# EAGLE board VisualightMicroDIY_033_gnd (EAGLE 6.2)
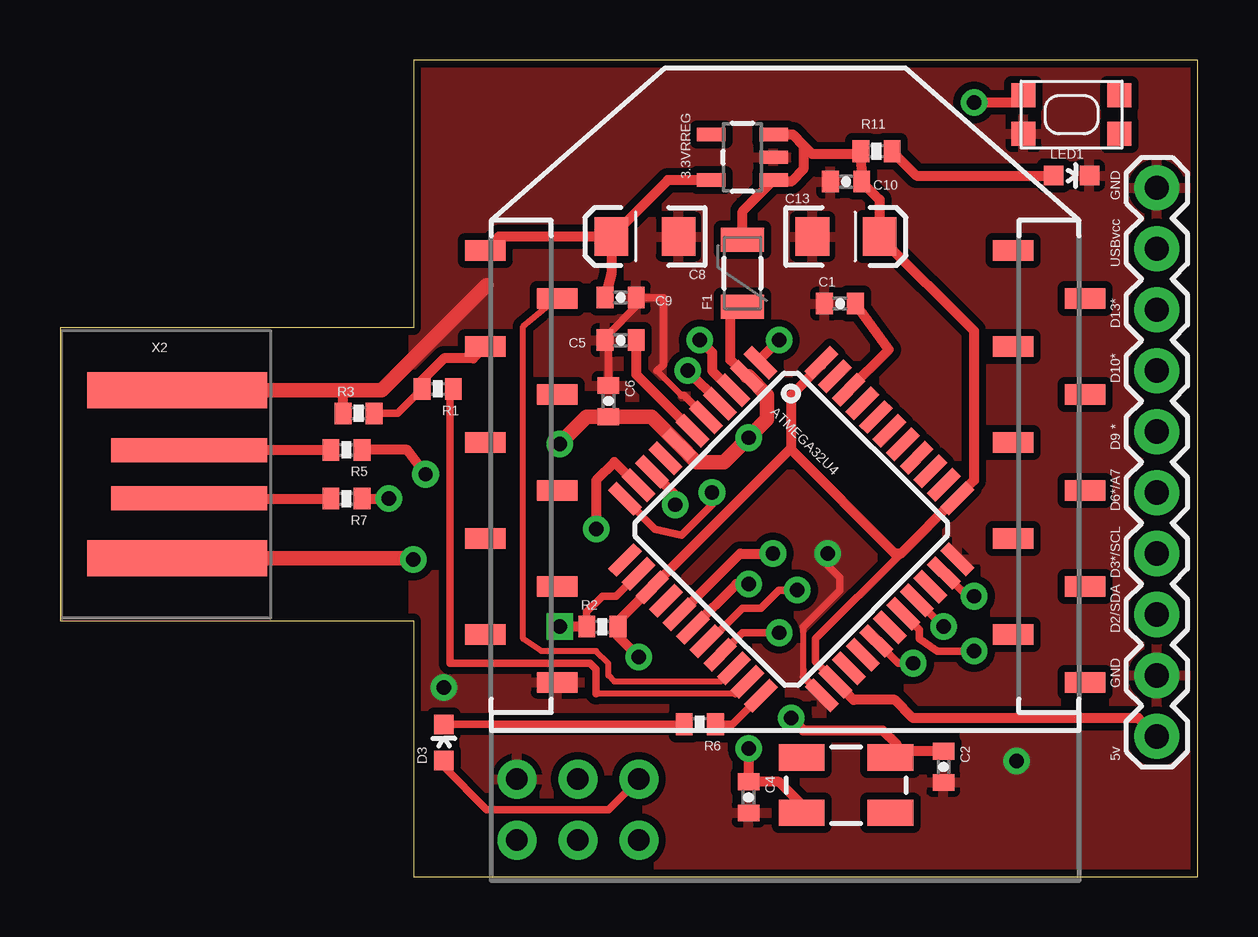
[diagram p0: board, top side]
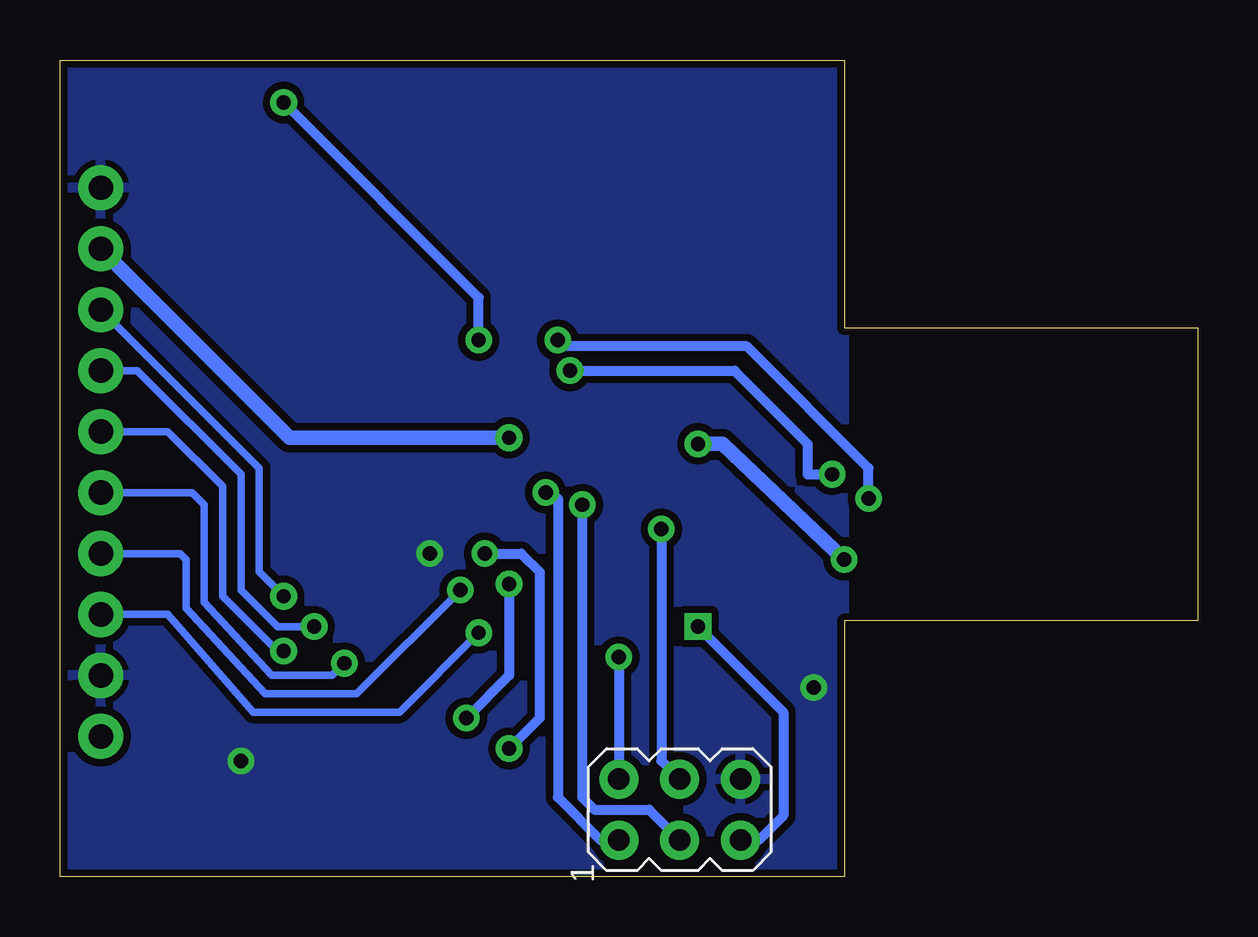
[diagram p1: board, bottom side, seen from below]

Size 47.42 x 34.03 mm. Coordinates in mm from the lower left corner, seen from the top.
Outline: 14.73,0 47.42,0 47.42,34.03 14.73,34.03 14.73,22.86 0,22.86 0,10.67 14.73,10.67 14.73,0
Copper layers (1*16): Top 0.035mm / dielectric 1.5mm / Bottom 0.035mm
Design rules: minimum track width 8mil, minimum drill 20mil, track to track 8mil, track to pad 8mil, pad to pad 8mil, via to via 8mil, smd to smd 8mil, copper to edge 10mil, drill to drill 8mil, minimum pad ring 12mil, minimum via ring 10mil, stop-mask expansion 4mil, vias tented up to drill 25mil, thermal gap 10mil
Net classes: 0 default: width 0.003 mm, drill 0.254 mm, clearance 0.152 mm

## Footprints (pad centres in the part's own frame; a part is rotated, then mirrored left to right if it is on the bottom)
SOT23-5 = smd 0.55 x 1.2: 1 -0.95,-1.3; 2 0,-1.3; 3 0.95,-1.3; 4 0.95,1.3; 5 -0.95,1.3
SPARKFUN-DIGITALIC_TQFP44 = smd 1.5 x 0.5: 1 -5.8,4; 2 -5.8,3.2; 3 -5.8,2.4; 4 -5.8,1.6; 5 -5.8,0.8; 6 -5.8,0; 7 -5.8,-0.8; 8 -5.8,-1.6; 9 -5.8,-2.4; 10 -5.8,-3.2; 11 -5.8,-4; 23 5.8,-4; 24 5.8,-3.2; 25 5.8,-2.4; 26 5.8,-1.6; 27 5.8,-0.8; 28 5.8,0; 29 5.8,0.8; 30 5.8,1.6; 31 5.8,2.4; 32 5.8,3.2; 33 5.8,4 | smd 0.5 x 1.5: 12 -4,-5.8; 13 -3.2,-5.8; 14 -2.4,-5.8; 15 -1.6,-5.8; 16 -0.8,-5.8; 17 0,-5.8; 18 0.8,-5.8; 19 1.6,-5.8; 20 2.4,-5.8; 21 3.2,-5.8; 22 4,-5.8; 34 4,5.8; 35 3.2,5.8; 36 2.4,5.8; 37 1.6,5.8; 38 0.8,5.8; 39 0,5.8; 40 -0.8,5.8; 41 -1.6,5.8; 42 -2.4,5.8; 43 -3.2,5.8; 44 -4,5.8
0402-CAP = smd 0.7 x 0.9: 1 -0.65,0; 2 0.65,0
EIA3216 = smd 1.4 x 1.6: A 1.4,0; C -1.4,0
LED-0603 = smd 0.8 x 0.8: A 0,-0.75; C 0,0.75
PTC-1206 = smd 1 x 1.8: 1 -1.4,0; 2 1.4,0
AVRISP = drill 0.9 pad 1.626: 1 -1.27,2.54; 2 1.27,2.54; 3 -1.27,0; 4 1.27,0; 5 -1.27,-2.54; 6 1.27,-2.54
1X10 = drill 1.016 pad 1.88: 1 0,0; 2 2.54,0; 3 5.08,0; 4 7.62,0; 5 10.16,0; 6 12.7,0; 7 15.24,0; 8 17.78,0; 9 20.32,0; 10 22.86,0
0402-RES = smd 0.7 x 0.9: 1 -0.65,0; 2 0.65,0
KMR2 = smd 1 x 1: 1 2,0.8; 2 2,-0.8; 3 -2,0.8; 4 -2,-0.8
XBEE-SMD = smd 1.7 x 0.85: 1 -12.5,20; 2 -9.5,18; 3 -12.5,16; 4 -9.5,14; 5 -12.5,12; 6 -9.5,10; 7 -12.5,8; 8 -9.5,6; 9 -12.5,4; 10 -9.5,2; 11 12.5,2; 12 9.5,4; 13 12.5,6; 14 9.5,8; 15 12.5,10; 16 9.5,12; 17 12.5,14; 18 9.5,16; 19 12.5,18; 20 9.5,20
USB-A-PCB = smd 7.5 x 1.5: 5V -0.2,-3.5; GND -0.2,3.5 | smd 6.5 x 1: USB_M 0.3,-1; USB_P 0.3,1
CRYSTAL-SMD-5X3 = smd 1.9 x 1.1: 1 -1.85,-1.15; 2 1.85,-1.15; 3 1.85,1.15; 4 -1.85,1.15

## Placement (x,y rotation side)
3.3VRREG  MIC5219 3.3V  [SOT23-5]  28.45,29.97 90 top
ATMEGA32U4  ATMEGA32U4  [SPARKFUN-DIGITALIC_TQFP44]  30.48,14.48 315.1 top
C1  0.1uF  [0402-CAP]  32.51,23.88 0 top
C2  22pF  [0402-CAP]  36.83,4.57 270 top
C4  22pF  [0402-CAP]  28.7,3.3 270 top
C5  1uF  [0402-CAP]  23.37,22.35 0 top
C6  1uF  [0402-CAP]  22.86,19.81 270 top
C8  10uF  [EIA3216]  24.38,26.67 180 top
C9  0.1uF  [0402-CAP]  23.37,24.13 180 top
C10  1uF  [0402-CAP]  32.77,28.96 180 top
C13  10uF  [EIA3216]  32.77,26.67 0 top
D3  Green  [LED-0603]  16,5.59 0 top
F1  500mA  [PTC-1206]  28.45,25.15 90 top
ISP1  AVRISP-6  [AVRISP]  21.59,2.79 90 bottom
JP1  M10"  [1X10]  45.72,5.84 90 top
LED1  Red  [LED-0603]  42.16,29.21 270 top
R1  2.2K  [0402-RES]  15.75,20.32 180 top
R2  10K  [0402-RES]  22.61,10.41 0 top
R3  3.3K  [0402-RES]  12.45,19.3 0 top
R5  22  [0402-RES]  11.94,17.78 180 top
R6  330  [0402-RES]  26.67,6.35 180 top
R7  22  [0402-RES]  11.94,15.75 180 top
R11  1K  [0402-RES]  34.04,30.23 180 top
SW1  SPST_TACT-KMR2  [KMR2]  42.16,31.75 0 top
U$1  XBEE-1B3  [XBEE-SMD]  30.23,6.1 0 top
X2  USBPCB  [USB-A-PCB]  5.08,16.76 0 top
Y1  16MHz  [CRYSTAL-SMD-5X3]  32.77,3.81 0 top

## Library data of the parts
3.3VRREG = SparkFun-PowerIC; PROD_ID: VREG-09872
ATMEGA32U4 = SparkFun-DigitalIC
C1 C2 C4-C6 C8-C10 C13 D3 F1 LED1 R1-R3 R5-R7 R11 Y1 = SparkFun
ISP1 SW1 = adafruit
JP1 X2 = SparkFun-Connectors
U$1 = SparkFun-RF; PROD_ID: CONN-09042

## Nets
+3V3_OUT: 3.3VRREG.5 C8.A C9.2 U$1.1
A0: ATMEGA32U4.36
A1: ATMEGA32U4.37
A2: ATMEGA32U4.38
A3: ATMEGA32U4.39
A4: ATMEGA32U4.40
A5: ATMEGA32U4.41
AREF: ATMEGA32U4.42 C1.2
D2: ATMEGA32U4.19 JP1.3
D3: ATMEGA32U4.18 JP1.4
D4: ATMEGA32U4.25
D5: ATMEGA32U4.31
D6: ATMEGA32U4.27 JP1.5
D7: ATMEGA32U4.1 SW1.3
D8: ATMEGA32U4.28
D9: ATMEGA32U4.29 JP1.6
D10: ATMEGA32U4.30 JP1.7
D11: ATMEGA32U4.12
D12: ATMEGA32U4.26
D13: ATMEGA32U4.32 JP1.8
D17: ATMEGA32U4.8
D+: ATMEGA32U4.4 R5.1
D-: ATMEGA32U4.3 R7.1
GND [vcc]: 3.3VRREG.2 ATMEGA32U4.5 ATMEGA32U4.15 ATMEGA32U4.23 ATMEGA32U4.33 ATMEGA32U4.35 ATMEGA32U4.43 C1.1 C2.2 C4.2 C5.1 C6.1 C8.C C9.1 C10.2 C13.C ISP1.6 JP1.2 JP1.10 LED1.C R3.1 SW1.4 U$1.10 X2.GND
MISO: ATMEGA32U4.11 ISP1.1
MOSI: ATMEGA32U4.10 ISP1.4
N$1: ATMEGA32U4.16 C4.1 Y1.1
N$2: ATMEGA32U4.17 C2.1 Y1.3
N$4: ATMEGA32U4.6 C5.2
N$6: R7.2 X2.USB_M
N$7: D3.C R6.2
N$8: R5.2 X2.USB_P
N$38: LED1.A R11.1
RESET: ATMEGA32U4.13 ISP1.5 R2.1
SCK: ATMEGA32U4.9 ISP1.3
TX: ATMEGA32U4.21 R1.1
TXLED: ATMEGA32U4.22 R6.1
UVCC: ATMEGA32U4.2 ATMEGA32U4.7 C6.2 F1.1 JP1.9 X2.5V
VCC: 3.3VRREG.1 3.3VRREG.3 ATMEGA32U4.14 ATMEGA32U4.24 ATMEGA32U4.34 ATMEGA32U4.44 C10.1 C13.A D3.A F1.2 ISP1.2 JP1.1 R2.2 R11.2
WIFIDIN: R1.2 R3.2 U$1.3
WIFIDOUT: ATMEGA32U4.20 U$1.2

## Tracks (layer width: path | path; a pad name or v marks a point on that pad's centre or on a via)
+3V3_OUT
  Top 0.406: C8.A 22.98,25.13 C9.2 | C8.A 18.3,26.67 U$1.1 | 3.3VRREG.5 25.34,29.02 C8.A
AREF
  Top 0.406: ATMEGA32U4.42 34.55,21.96 C1.2
D2  (via drill 0.6)
  Top 0.305: v29.97,10.16 28.44,10.16 ATMEGA32U4.19
  Bottom 0.305: JP1.3 42.93,10.92 39.37,6.86 33.27,6.86 v29.97,10.16
D3  (via drill 0.6)
  Top 0.305: v30.73,11.94 29.97,11.94 29.21,11.18 28.45,11.18 26.92,9.65 26.92,9.78 ATMEGA32U4.18
  Bottom 0.305: JP1.4 42.42,13.46 42.16,13.21 42.16,11.18 38.86,7.62 35.05,7.62 v30.73,11.94
D6  (via drill 0.6)
  Top 0.305: v35.56,8.89 34.95,8.89 ATMEGA32U4.27
  Bottom 0.305: JP1.5 41.91,16 41.4,15.49 41.4,11.43 38.61,8.38 36.07,8.38 v35.56,8.89
D7  (via drill 0.6)
  Top 0.406: ATMEGA32U4.1 29.2,21.58 v29.97,22.35 | v38.1,32.26 39.87,32.26 SW1.3
  Bottom 0.406: v29.97,22.35 29.97,24.13 v38.1,32.26
D9  (via drill 0.6)
  Top 0.305: v38.1,9.4 36.58,9.4 35.81,9.91 35.81,10.29 ATMEGA32U4.29
  Bottom 0.305: JP1.6 42.93,18.54 40.64,16.26 40.64,11.68 38.35,9.4 v38.1,9.4
D10  (via drill 0.6)
  Top 0.305: v36.83,10.41 36.82,10.41 ATMEGA32U4.30
  Bottom 0.305: JP1.7 44.2,21.08 39.88,16.76 39.88,11.94 38.35,10.41 v36.83,10.41
D13  (via drill 0.6)
  Top 0.305: v38.1,11.68 37.81,11.68 ATMEGA32U4.32
  Bottom 0.305: JP1.8 39.12,17.02 39.12,12.7 v38.1,11.68
D+  (via drill 0.6)
  Top 0.406: ATMEGA32U4.4 27.5,19.74 v26.16,21.08 | v15.24,16.76 14.48,17.78 R5.1
  Bottom 0.406: v26.16,21.08 19.3,21.08 16.26,18.03 16.26,16.76 v15.24,16.76
D-  (via drill 0.6)
  Top 0.406: R7.1 v13.72,15.75 | v26.67,22.35 27.18,21.84 27.18,21.08 27.99,20.27 ATMEGA32U4.3
  Bottom 0.406: v13.72,15.75 13.72,17.02 18.8,22.1 26.42,22.1 v26.67,22.35
GND  (via drill 0.6)
  Top 0.254: 30.99,8.33 30.99,10.41 | 25.91,20.07 24.89,21.08
  Top 0.305: ATMEGA32U4.23 30.99,8.33 | 30.99,10.41 32.51,11.94 32.51,12.45 32,12.95 v32,13.46 | ATMEGA32U4.5 26.01,20.07 25.91,20.07 | 24.89,21.08 25.15,21.34 25.15,24.13 C9.1 24.02,23.76 22.86,22.61 C6.1
  Top 0.406: R3.1 11.8,20.12 11.94,20.26
  Top 0.61: X2.GND 11.94,20.26 13.41,20.26 17.78,24.64
  other vias: 16,7.87 39.88,4.83
  pour Top (isolate 0.305): 14.73,34.04 47.5,34.04 47.5,25.15 47.5,0 14.73,0
  pour Bottom (isolate 0.305): 14.73,34.04 47.5,34.04 47.5,0 14.73,0
MISO  (via drill 0.6)
  Top 0.305: ATMEGA32U4.11 24.81,14.48 25.91,14.22 27.18,15.49 v27.18,16
  Bottom 0.406: v27.18,16 26.67,15.75 26.67,3.3 24.89,1.52 ISP1.1
MOSI  (via drill 0.6)
  Top 0.406: ATMEGA32U4.10 24.08,16.3 23.11,17.27 22.35,16.51 v22.35,14.48
  Bottom 0.406: v22.35,14.48 22.35,4.83 ISP1.4
N$1  (via drill 0.6)
  Top 0.406: Y1.1 30.92,3.01 29.97,3.95 C4.1 v28.7,5.33 | ATMEGA32U4.16 28.35,13.46 v29.72,13.46
  Bottom 0.406: v29.72,13.46 28.19,13.46 27.43,12.7 27.43,6.6 v28.7,5.33
N$2  (via drill 0.6)
  Top 0.406: C2.1 34.88,5.22 | 34.88,5.22 Y1.3 | ATMEGA32U4.17 28.19,12.19 v28.7,12.19 | v30.48,6.6 30.99,6.1 34.29,6.1 34.88,5.51 34.88,5.22
  Bottom 0.406: v28.7,12.19 28.7,8.38 v30.48,6.6
N$4
  Top 0.406: C5.2 24.02,20.93 ATMEGA32U4.6
N$6
  Top 0.305: X2.USB_M 5.4,15.75
  Top 0.406: 5.4,15.75 R7.2
N$7
  Top 0.305: R6.2 16.01,6.35 D3.C
N$8
  Top 0.305: X2.USB_P 5.4,17.78
  Top 0.406: 5.4,17.78 R5.2
N$38
  Top 0.406: R11.1 35.7,29.21 LED1.A
RESET  (via drill 0.6)
  Top 0.305: 21.96,10.47 21.96,11.03 22.61,11.68 23.17,11.68 ATMEGA32U4.13
  Top 0.406: 21.96,10.47 R2.1 v20.83,10.41
  Bottom 0.406: v20.83,10.41 17.27,6.86 17.27,2.54 18.29,1.52 ISP1.5
SCK  (via drill 0.6)
  Top 0.406: ATMEGA32U4.9 25.65,15.9 v25.65,15.49
  Bottom 0.406: v25.65,15.49 25.65,3.3 25.15,2.79 22.86,2.79 ISP1.3
TX
  Top 0.254: 28.16,7.62 22.35,7.62
  Top 0.305: ATMEGA32U4.21 28.16,7.62 | 22.35,7.62 22.35,8.64 22.1,8.89 16.26,8.89 16.26,20.32 R1.1
TXLED
  Top 0.305: R6.1 28.02,6.35 ATMEGA32U4.22
UVCC  (via drill 0.6)
  Top 0.406: ATMEGA32U4.2 27.94,21.53 27.94,23.62 28.06,23.75 F1.1
  Top 0.61: ATMEGA32U4.2 28.69,20.84 29.46,20.07 29.46,19.05 v28.7,18.29 27.69,17.27 26.54,17.27 ATMEGA32U4.7 24.65,19.16 C6.2 21.96,19.16 v20.83,18.03 | X2.5V 14.53,13.26 v14.73,13.21
  Bottom 0.61: v28.7,18.29 37.85,18.29 JP1.9 | v14.73,13.21 19.81,18.03 v20.83,18.03
VCC  (via drill 0.6)
  Top 0.305: ATMEGA32U4.24 31.5,8.95 31.5,9.91 35.05,13.46 | ISP1.2 22.86,2.79 17.78,2.79 16,4.57 D3.A
  Top 0.406: 30.44,17.82 ATMEGA32U4.14 23.26,10.63 R2.2 23.26,10.02 v24.13,9.14 | 30.44,17.82 30.48,17.86 30.48,20.07 31.74,21.33 ATMEGA32U4.44 | 30.48,17.78 34.8,13.46 35.05,13.46 37.35,15.76 ATMEGA32U4.34 37.41,15.82 38.1,16.51 38.1,22.74 C13.A 34.17,28.21 C10.1 R11.2 33.27,30.11 31.36,30.11 30.99,30.48 | F1.2 28.45,27.72 3.3VRREG.1 29.81,28.96 30.48,28.96 30.99,29.46 30.99,30.48 | 3.3VRREG.3 30.55,30.92 30.99,30.48 | JP1.1 44.96,6.6 35.56,6.6 34.8,7.37 33.08,7.37 ATMEGA32U4.24 | 30.48,17.78 | 30.48,17.78 30.44,17.82
  Bottom 0.406: v24.13,9.14 ISP1.2
WIFIDIN
  Top 0.305: R1.2 14.08,19.3 R3.2
  Top 0.406: U$1.3 17.22,21.59 16,21.59 15.1,20.69 R1.2
WIFIDOUT
  Top 0.254: ATMEGA32U4.20 27.54,8.13 23.11,8.13 22.86,8.38 22.86,8.89 22.35,9.4 20.07,9.4 19.3,9.91 19.3,22.93 U$1.2

## Text on the board
tPlace: GND | USBvcc | D13* | D10* | D9 * | D6*/A7 | D3*/SCL | D2/SDA | GND | 5v